# Altium PCB PCB1.PcbDoc (part 2 of 2)
Units mm, origin at the board's own origin, x right, y up, seen from the top; angles counter-clockwise.
Board outline 52.96 x 71.5 mm, 2 copper layers (Top Layer, Bottom Layer); 40 components, 74 nets, 275 pads, 212 vias.
Unrouted connection lines stored in the file: 1.
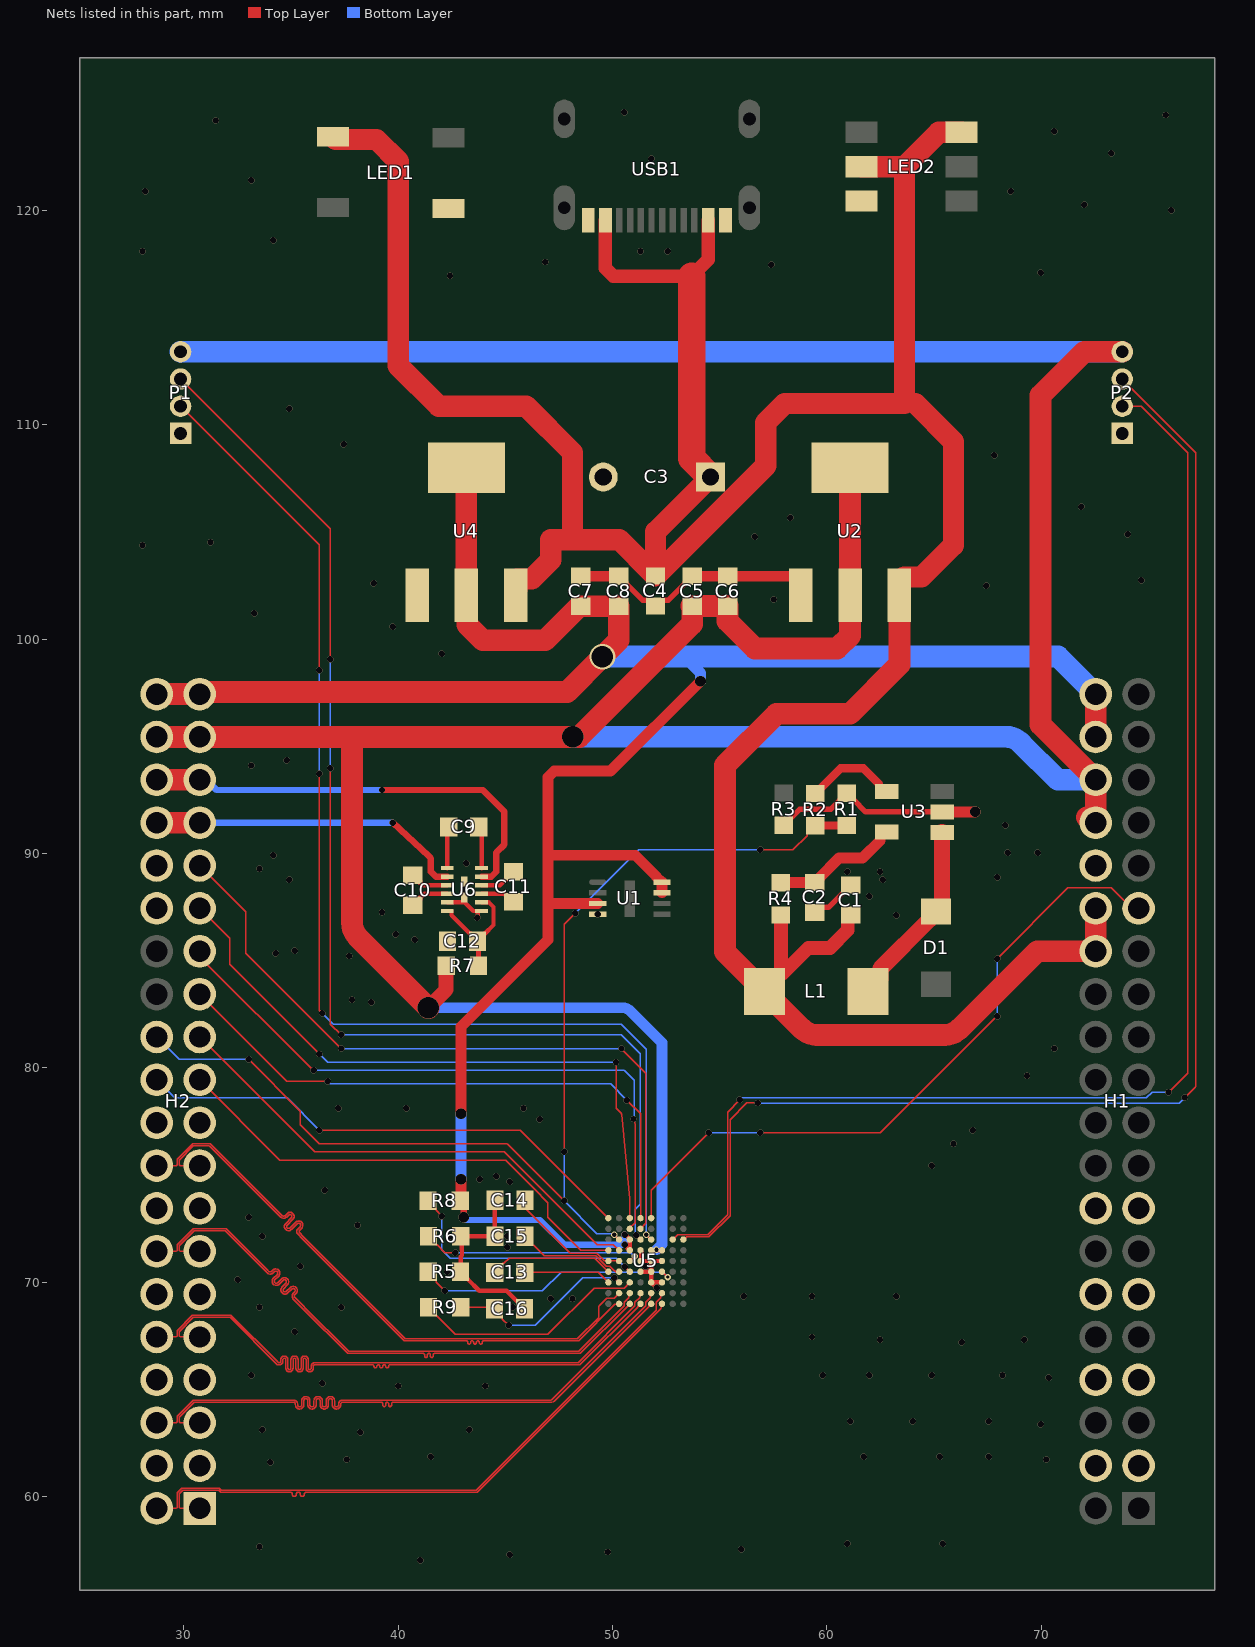
[diagram p2: the nets of this part, all layers, seen from the top]

## Via types
v1: diameter 0.3, hole 0.3, Top Layer to Bottom Layer, tented both sides, 199 vias
v2: diameter 0.5, hole 0.5, Top Layer to Bottom Layer, tented both sides, 5 vias
v3: diameter 0.3, hole 0.2, Top Layer to Bottom Layer, tented both sides, 3 vias
v4: diameter 1, hole 1, Top Layer to Bottom Layer, tented both sides, 2 vias
v5: diameter 0.3, hole 0.15, Top Layer to Bottom Layer, tented both sides, 2 vias
v6: diameter 1.2, hole 1, Top Layer to Bottom Layer, tented both sides, 1 vias

## Nets (pads, with @x,y where several pads share a name; then routed paths per layer and width w, separated by ;. In a path a pad name is that pad's centre, name@x,y a point inside that pad or via, vN(x,y) a via of type N, cw(c..) or ccw(c..) an arc to the next point about the centre after c; other vN are vias at no path point) (continued)
GND: C1.2 C2.2 C3.2 C4.2 C5.2 C6.2 C7.2 C8.2 C12.2 C14.2 C15.2 C16.2 H1.3 H1.4 H1.7 H1.8 H1.11 H1.12 H1.15 H1.16 H1.32 H2.3 H2.4 H2.7 H2.8 H2.11 H2.12 H2.15 H2.16 H2.19 H2.20 H2.30 H2.32 LED1.3 LED2.6 P1.1 P2.1 R1.1 R3.1 R5.2 R6.2 U1.4 U2.1 U3.2 U4.1 U5.D4 U5.E4 U5.E5 U5.E6 U5.F4 U5.F5 U5.G5 U5.G6 U6.5 U6.7 USB1.A1B12 USB1.B1A12 | length 39.5
  Top Layer w0.203: U6.5@42.291,87.719 43.02,87.719 U6.5@43.118,87.818 ; U6.5@43.076,87.75 43.508,87.319 U6.7@43.891,87.319 ; v1(43.688,86.995) 43.707,87.014 U6.7@43.707,87.317 ; C14.2@44.514,73.813 44.512,73.811 C15.2@44.512,72.136 R6.2@42.917,72.136 42.961,72.092 42.961,71.518 42.979,71.501 42.979,71.247 42.926,71.194 42.926,70.489 R5.2@42.909,70.472 42.909,70.443 43.21,70.141 43.239,70.141 43.785,69.596 45.06,69.596 45.549,69.107 45.599,69.107 45.898,68.809 C16.2@45.898,68.759 ; U5.F4@51.308,70.485 U5.F5@51.808,70.485 ; U5.D4@51.308,71.485 51.308,71.459 51.342,71.425 51.342,71.085 51.327,71.07 51.327,71.004 U5.E4@51.308,70.985 U5.E5@51.808,70.985 ; v1(51.562,70.739) 51.808,70.739 ; 51.804,70.231 51.808,70.235 ; v1@52.07,69.723 U5.G5@51.808,69.985 ; U5.G6@52.308,69.985 U5.G5@51.808,69.985 ; U5.E6@52.308,70.985 U5.E5@51.808,70.985 ; U5.G5@51.808,69.985 51.808,70.235 ; 51.808,70.235 U5.F5@51.808,70.485 ; U5.F5@51.808,70.485 51.808,70.739 ; 51.808,70.739 U5.E5@51.808,70.985
  Top Layer w0.254: C8.2@50.292,102.935 50.342,102.935 50.615,102.662 50.615,102.612 51.404,101.823 51.734,101.823 C4.2@52.006,101.55 52.279,101.823 52.609,101.823 53.398,102.612 53.398,102.662 53.671,102.935 C5.2@53.721,102.935 ; R3.1@57.989,91.316 58.018,91.316 58.294,91.592 58.294,91.621 58.743,92.069 60.192,92.069 60.631,92.509 60.631,92.538 60.908,92.814 R1.1@60.936,92.814 60.965,92.814 61.241,92.538 61.241,92.509 61.809,91.941 U3.2@65.379,91.941 ; C2.2@59.436,87.249 59.673,87.486 60.08,87.486 60.792,88.199 60.792,88.249 61.065,88.522 C1.2@61.115,88.522
  Top Layer w0.508: C7.2@48.514,102.935 C8.2@50.292,102.935 ; C5.2@53.721,102.935 C6.2@55.372,102.935 58.491,102.935 58.787,102.639 U2.1@58.787,102.059 ; U3.2@65.379,91.941 66.922,91.941 v2(66.929,91.948)
  other v1: 41.021,57.023 45.212,57.277 49.784,57.404 56.007,57.531 33.528,57.658 60.96,57.785 65.405,57.785 34.036,61.595 37.592,61.722 70.231,61.722 41.529,61.849 61.722,61.849 65.278,61.849 67.564,61.849 38.227,62.992 33.655,63.119 43.307,63.119 69.977,63.373 61.087,63.5 64.008,63.5 67.564,63.5 40.005,65.151 44.069,65.151 36.449,65.278 70.358,65.532 33.147,65.659 59.817,65.659 61.976,65.659 64.897,65.659 68.199,65.659 66.294,67.183 62.484,67.31 69.215,67.31 59.309,67.437 35.179,67.691 33.528,68.834 37.338,68.834 45.339,68.834 47.117,69.215 48.133,69.215 56.134,69.342 59.309,69.342 63.246,69.342 52.064,69.736 32.512,70.104 42.291,70.485 35.433,70.739 45.085,71.628 33.655,72.136 42.418,72.136 45.085,72.136 38.1,72.644 33.02,73.025 36.576,74.295 45.212,74.676 43.815,74.803 44.577,74.93 64.897,75.438 65.913,76.454 66.802,77.089 46.609,77.597 37.211,78.105 40.386,78.105 45.847,78.105 69.342,79.629 70.612,80.899 38.735,83.058 37.846,83.185 37.719,85.217 34.29,85.344 35.179,85.471 40.767,85.979 39.878,86.233 63.246,87.122 49.314,87.165 39.243,87.249 61.976,88.011 43.091,88.319 34.925,88.773 62.611,88.773 67.945,88.9 60.96,89.154 62.484,89.154 33.528,89.281 43.18,89.535 34.163,89.916 68.453,90.043 69.85,90.043 68.326,91.313 33.147,94.107 34.798,94.361 42.037,99.314 39.751,100.584 33.274,101.219 57.531,101.854 67.437,102.489 38.862,102.616 74.676,102.743 28.067,104.394 31.242,104.521 56.642,104.775 74.041,104.902 58.293,105.664 71.882,106.172 67.818,108.585 37.465,109.093 34.925,110.744 42.418,116.967 69.977,117.094 57.404,117.475 46.863,117.602 28.067,118.11 51.308,118.11 52.578,118.11 34.163,118.618 76.073,120.015 72.009,120.269 28.194,120.904 68.58,120.904 33.147,121.412 51.816,122.428 73.279,122.682 70.612,123.698 31.496,124.206 75.819,124.46 50.546,124.587
IOVCC: C7.1 C8.1 H1.38 H1.40 H2.39 H2.40 R8.2 U1.3 U1.7 U1.8 U4.2 U4.4 U5.C3 U5.D3 | length 116.4
  Top Layer w0.2: v1(50.563,71.738) 50.563,71.73 U5.D3@50.808,71.485 U5.C3@50.808,71.985 ; v1(50.581,72.212) cw(c50.494,72.032) 50.636,72.173 50.769,72.04 cw(c50.628,71.898) U5.C3@50.808,71.985
  Top Layer w0.3: R8.2@42.899,73.798 43.053,73.644 v2(43.053,73.025)
  Top Layer w0.5: R8.2@42.899,73.798 42.926,73.825 v2(42.926,74.803) ; v2(42.926,77.851) 42.926,81.915 46.99,85.979 46.99,87.63 ; U1.3@49.314,87.665 47.025,87.665 46.99,87.63 ; U1.7@52.314,88.165 U1.8@52.314,88.665 52.289,88.665 52.039,88.915 52.039,88.94 51.063,89.916 46.99,89.916 ; v2(54.102,98.044) 49.911,93.853 47.283,93.853 46.99,93.56 46.99,89.916 ; 46.99,87.63 46.99,89.916
  Top Layer w1.016: H2.40@28.734,97.438 H2.39@30.734,97.438 30.831,97.535 H2.39@31.19,97.535 ; H2.39@31.191,97.536 47.879,97.536 v6(49.53,99.187) 50.292,99.949 C8.1@50.292,101.535 C7.1@48.514,101.535 48.449,101.535 46.863,99.949 43.942,99.949 43.222,100.669 43.222,102.017 U4.2@43.18,102.059 U4.4@43.18,107.999 ; H1.38@72.549,95.438 H1.40@72.549,97.438
  Bottom Layer w0.3: v2(43.053,73.025) 43.18,72.898 46.609,72.898 47.769,71.738 v1(50.563,71.738) 50.563,72.112 cw(c50.863,72.112) v1(50.581,72.212)
  Bottom Layer w0.5: v2(42.926,74.803) v2(42.926,77.851) ; 53.34,99.187 54.102,98.425 v2(54.102,98.044)
  Bottom Layer w1.016: v6(49.53,99.187) 53.34,99.187 70.8,99.187 H1.40@72.549,97.438
NetC2_1: C2.1 R4.1 U3.5 | length 6.1
  Top Layer w0.508: R4.1@57.862,88.64 57.871,88.649 C2.1@59.436,88.649 59.486,88.649 59.632,88.795 59.632,88.845 60.57,89.783 61.672,89.783 62.495,90.607 62.495,90.897 62.591,90.993 U3.5@62.791,90.993
NetC9_1: C9.1 U6.12 | length 2
  Top Layer w0.203: C9.1@43.76,91.24 43.891,91.109 U6.12@43.891,89.319
NetC9_2: C9.2 U6.1 | length 1.9
  Top Layer w0.203: U6.1@42.291,89.319 42.291,91.171 C9.2@42.36,91.24
NetC10_1: C10.1 U6.3 | length 1.8
  Top Layer w0.203: C10.1@41.001,88.668 41.15,88.519 U6.3@42.291,88.519
  Top Layer w0.254: C10.1@40.678,88.988 40.728,88.988 41.001,88.715 C10.1@41.001,88.668
NetC10_2: C10.2 U6.4 | length 1.9
  Top Layer w0.203: C10.2@41.001,87.911 41.209,88.119 U6.4@42.291,88.119
  Top Layer w0.254: C10.2@40.678,87.588 40.728,87.588 41.001,87.861 C10.2@41.001,87.911
NetC11_1: C11.1 U6.9 | length 1.6
  Top Layer w0.203: U6.9@43.891,88.119 44.954,88.119 C11.1@45.327,87.746
  Top Layer w0.254: C11.1@45.327,87.746 C11.1@45.377,87.746
NetC11_2: C11.2 U6.10 | length 1.8
  Top Layer w0.203: U6.10@43.891,88.519 44.75,88.519 C11.2@45.054,88.823
  Top Layer w0.254: C11.2@45.054,88.823 45.054,88.873 45.327,89.146 C11.2@45.377,89.146
NetC12_1: C12.1 R7.1 U6.6 U6.8 | length 5.8
  Top Layer w0.203: U6.6@42.291,87.319 42.488,87.319 42.489,87.317 42.489,87.121 43.356,86.254 43.397,86.254 C12.1@43.695,85.956 ; C12.1@43.695,85.906 C12.1@43.695,85.956 ; U6.8@43.891,87.719 44.234,87.719 44.45,87.503 44.45,86.661 44.043,86.254 43.993,86.254 C12.1@43.695,85.956
  Top Layer w0.254: C12.1@43.695,85.906 43.748,85.853 R7.1@43.748,84.763
NetC13_1: C13.1 U5.G1 | length 4.1
  Top Layer w0.06: C13.1@45.906,70.449 49.344,70.449 U5.G1@49.808,69.985
NetC13_2: C13.2 U5.F1 | length 5.9
  Top Layer w0.06: C13.2@44.506,70.449 44.506,70.499 44.876,70.869 44.926,70.869 45.177,71.12 49.173,71.12 U5.F1@49.808,70.485
NetC14_1: C14.1 U5.E1 U5.E2 | length 5.8
  Top Layer w0.06: C14.1@45.914,73.813 45.914,73.491 ccw(c45.974,73.491) 45.931,73.449 48.013,71.367 ccw(c48.055,71.41) 48.054,71.35 49.268,71.35 49.611,71.007 49.786,71.007 U5.E1@49.808,70.985 U5.E2@50.308,70.985
NetC15_1: C15.1 U5.F2 | length 5.1
  Top Layer w0.06: C15.1@45.912,72.136 45.912,72.086 46.282,71.716 46.332,71.716 46.813,71.235 49.221,71.235 49.706,70.75 49.875,70.75 50.043,70.583 50.123,70.502 ccw(c50.165,70.545) 50.165,70.485 U5.F2@50.308,70.485
NetD1_1: D1.1 L1.2 U3.1 | length 9
  Top Layer w0.762: L1.2@61.926,83.56 62.507,84.141 62.507,84.637 64.782,86.913 64.782,87.073 65.219,87.51 65.379,87.51 U3.1@65.379,90.991
NetR2_1: R2.1 U3.4 | length 4.4
  Top Layer w0.381: R2.1@59.463,92.797 59.492,92.797 59.704,93.01 59.704,93.038 60.64,93.974 61.71,93.974 62.432,93.253 62.432,93.053 62.591,92.893 U3.4@62.791,92.893
NetR5_1: R5.1 U5.F6 | length 12.4
  Top Layer w0.06: R5.1@41.402,70.472 41.766,70.108 41.766,69.994 v1(42.164,69.596) ; U5.F6@52.308,70.485 52.324,70.485 v5(52.576,70.233)
  Bottom Layer w0.06: v1(42.164,69.596) 46.711,69.596 ccw(c46.711,69.656) 46.753,69.613 47.582,70.442 cw(c47.624,70.399) 47.624,70.459 52.325,70.459 cw(c52.325,70.399) 52.367,70.442 v5(52.576,70.233)
NetR6_1: R6.1 U5.E3 | length 10.3
  Top Layer w0.06: R6.1@41.411,72.136 41.411,72.107 41.784,71.734 41.813,71.734 42.173,71.374 v1(42.672,71.374) ; U5.E3@50.808,70.985 v5(51.035,71.212)
  Bottom Layer w0.06: v1(42.672,71.374) 50.858,71.374 51.019,71.212 v5(51.035,71.212)
NetR8_1: R8.1 U5.F3 | length 11.8
  Top Layer w0.06: R8.1@41.392,73.798 41.766,73.424 41.766,73.357 v1(42.043,73.08) ; v1(50.581,70.712) U5.F3@50.808,70.485
  Bottom Layer w0.06: v1(42.043,73.08) 42.035,73.072 42.035,71.528 ccw(c42.095,71.528) 42.052,71.486 42.401,71.137 ccw(c42.443,71.18) 42.442,71.12 50.173,71.12 v1(50.581,70.712)
NetR9_1: R9.1 U5.G3 | length 10.9
  Top Layer w0.06: R9.1@41.411,68.834 41.411,68.805 41.784,68.432 41.804,68.432 42.672,67.564 46.99,67.564 49.146,69.72 50.543,69.72 U5.G3@50.808,69.985
PWM_EN: H1.29 U5.A5 | length 31.9
  Top Layer w0.06: U5.A5@51.808,72.985 51.808,74.287 v1(54.483,76.962) ; v1(56.896,76.962) 62.484,76.962 67.931,82.409 v1(67.959,82.409) ; v1(67.945,85.09) 71.255,88.4 73.271,88.4 74.233,87.438 H1.29@74.549,87.438
  Bottom Layer w0.06: v1(54.483,76.962) v1(56.896,76.962) ; v1(67.945,85.09) 67.945,82.423 v1(67.959,82.409)
SWCLK: P2.2 U5.C7 | length 62.9
  Top Layer w0.06: U5.C7@52.808,71.985 53.044,72.221 54.441,72.221 55.372,73.152 55.372,77.934 v1(55.941,78.503) ; P2.2@73.787,110.871 74.676,110.871 76.835,108.712 76.835,79.756 v1(75.946,78.867)
  Bottom Layer w0.06: v1(55.941,78.503) 56.011,78.573 cw(c56.054,78.531) 56.054,78.591 72.198,78.591 74.9,78.591 75.176,78.867 v1(75.946,78.867)
SWDIO: P2.3 U5.C8 | length 63.9
  Top Layer w0.06: U5.C8@53.308,71.985 53.342,71.985 53.463,72.106 54.489,72.106 55.487,73.104 55.487,77.585 56.261,78.359 56.766,78.359 v1(56.769,78.356) ; P2.3@73.787,112.141 77.216,108.712 77.216,79.146 cw(c77.156,79.146) 77.199,79.104 v1(76.708,78.613)
  Bottom Layer w0.06: v1(56.769,78.356) 76.451,78.356 v1(76.708,78.613)
TD_CLKN: H2.10 U5.H4 | length 28.7
  Top Layer w0.06: H2.10@28.734,67.438 29.649,67.438 29.684,67.473 29.684,67.734 30.401,68.451 32.198,68.451 34.372,66.277 34.408,66.242 34.452,66.242 ccw(c34.452,66.31) 34.52,66.31 34.52,66.379 cw(c34.688,66.379) 34.688,66.547 cw(c34.688,66.379) 34.857,66.379 34.857,65.986 ccw(c34.925,65.986) 34.925,65.918 ccw(c34.925,65.986) 34.993,65.986 34.993,66.379 cw(c35.161,66.379) 35.161,66.547 cw(c35.161,66.379) 35.329,66.379 35.329,65.986 ccw(c35.397,65.986) 35.397,65.918 ccw(c35.397,65.986) 35.465,65.986 35.465,66.379 cw(c35.633,66.379) 35.633,66.547 cw(c35.633,66.379) 35.801,66.379 35.801,65.986 ccw(c35.869,65.986) 35.869,65.918 ccw(c35.869,65.986) 35.938,65.986 35.938,66.074 cw(c36.106,66.074) 36.106,66.242 36.489,66.242 48.397,66.242 51.043,68.888 51.043,69.052 51.262,69.271 51.262,69.439 U5.H4@51.308,69.485
TD_CLKP: H2.9 U5.J4 | length 28.7
  Top Layer w0.06: H2.9@30.734,67.438 29.819,67.438 29.784,67.473 29.784,67.693 30.442,68.351 32.156,68.351 34.366,66.142 34.372,66.142 34.452,66.142 ccw(c34.452,66.31) 34.62,66.31 34.62,66.379 cw(c34.688,66.379) 34.688,66.447 cw(c34.688,66.379) 34.757,66.379 34.757,65.986 ccw(c34.925,65.986) 34.925,65.818 ccw(c34.925,65.986) 35.093,65.986 35.093,66.379 cw(c35.161,66.379) 35.161,66.447 cw(c35.161,66.379) 35.229,66.379 35.229,65.986 ccw(c35.397,65.986) 35.397,65.818 ccw(c35.397,65.986) 35.565,65.986 35.565,66.379 cw(c35.633,66.379) 35.633,66.447 cw(c35.633,66.379) 35.701,66.379 35.701,65.986 ccw(c35.869,65.986) 35.869,65.818 ccw(c35.869,65.986) 36.038,65.986 36.038,66.074 cw(c36.106,66.074) 36.106,66.142 36.489,66.142 38.636,66.142 38.802,66.142 cw(c38.802,66.074) 38.871,66.074 38.871,66.066 ccw(c38.939,66.066) 39.007,66.066 39.007,66.074 cw(c39.075,66.074) 39.143,66.074 39.143,66.066 ccw(c39.211,66.066) 39.279,66.066 39.279,66.074 cw(c39.347,66.074) 39.415,66.074 39.415,66.066 ccw(c39.483,66.066) 39.552,66.066 39.552,66.074 cw(c39.62,66.074) 39.62,66.142 39.88,66.142 48.454,66.142 ccw(c48.454,66.202) 48.496,66.159 51.167,68.83 ccw(c51.125,68.872) 51.176,68.841 51.191,68.866 cw(c51.242,68.834) 51.199,68.876 U5.J4@51.308,68.985
TD_CS: H2.31 U5.B4 | length 33.3
  Top Layer w0.06: H2.31@30.734,89.438 32.893,87.279 32.893,85.344 v1(37.338,80.899) ; v1(50.419,80.899) 51.562,79.756 51.562,72.739 U5.B4@51.308,72.485
  Bottom Layer w0.06: v1(37.338,80.899) v1(50.419,80.899)
TD_D0N: H2.2 U5.H6 | length 28.5
  Top Layer w0.06: H2.2@28.734,59.438 29.649,59.438 29.684,59.473 29.684,60.174 29.9,60.39 31.66,60.39 31.752,60.298 43.649,60.298 52.043,68.692 52.043,69.052 52.262,69.271 52.262,69.439 U5.H6@52.308,69.485
TD_D0P: H2.1 U5.J6 | length 28.5
  Top Layer w0.06: H2.1@30.734,59.438 29.819,59.438 29.784,59.473 29.784,60.132 29.942,60.29 31.618,60.29 31.71,60.198 34.747,60.198 34.964,60.198 cw(c34.964,60.105) 35.058,60.105 35.058,60.089 ccw(c35.151,60.089) 35.245,60.089 35.245,60.105 cw(c35.338,60.105) 35.432,60.105 35.432,60.089 ccw(c35.525,60.089) 35.619,60.089 35.619,60.105 cw(c35.712,60.105) 35.712,60.198 35.899,60.198 43.69,60.198 52.25,68.758 ccw(c52.208,68.8) 52.268,68.8 52.268,68.928 cw(c52.328,68.928) U5.J6@52.308,68.985
TD_D1N: H2.6 U5.H5 | length 28.5
  Top Layer w0.06: H2.6@28.734,63.438 29.649,63.438 29.684,63.473 29.684,63.734 30.439,64.489 32.622,64.489 ccw(c32.622,64.549) 32.626,64.489 32.692,64.492 cw(c32.7,64.332) 32.699,64.492 34.823,64.492 35.114,64.492 cw(c35.114,64.299) 35.308,64.299 35.308,64.27 ccw(c35.401,64.27) 35.495,64.27 35.495,64.467 cw(c35.688,64.467) 35.882,64.467 35.882,64.27 ccw(c35.975,64.27) 36.069,64.27 36.069,64.467 cw(c36.262,64.467) 36.456,64.467 36.456,64.27 ccw(c36.549,64.27) 36.643,64.27 36.643,64.467 cw(c36.836,64.467) 37.03,64.467 37.03,64.27 ccw(c37.123,64.27) 37.217,64.27 37.217,64.299 cw(c37.41,64.299) 37.41,64.492 37.49,64.492 47.123,64.492 ccw(c47.123,64.552) 47.165,64.51 51.543,68.888 51.543,69.052 51.762,69.271 51.762,69.439 U5.H5@51.808,69.485
TD_D1P: H2.5 U5.J5 | length 28.5
  Top Layer w0.06: H2.5@30.734,63.438 29.819,63.438 29.784,63.473 29.784,63.693 30.48,64.389 32.65,64.389 ccw(c32.65,64.449) 32.655,64.389 32.695,64.392 cw(c32.7,64.332) 32.699,64.392 34.823,64.392 35.114,64.392 cw(c35.114,64.299) 35.208,64.299 35.208,64.27 ccw(c35.401,64.27) 35.595,64.27 35.595,64.467 cw(c35.688,64.467) 35.782,64.467 35.782,64.27 ccw(c35.975,64.27) 36.169,64.27 36.169,64.467 cw(c36.262,64.467) 36.356,64.467 36.356,64.27 ccw(c36.549,64.27) 36.743,64.27 36.743,64.467 cw(c36.836,64.467) 36.93,64.467 36.93,64.27 ccw(c37.123,64.27) 37.317,64.27 37.317,64.299 cw(c37.41,64.299) 37.41,64.392 37.49,64.392 39.047,64.392 39.213,64.392 cw(c39.213,64.324) 39.281,64.324 39.281,64.261 ccw(c39.349,64.261) 39.417,64.261 39.417,64.324 cw(c39.485,64.324) 39.554,64.324 39.554,64.261 ccw(c39.622,64.261) 39.69,64.261 39.69,64.324 cw(c39.758,64.324) 39.758,64.392 40.087,64.392 47.123,64.392 ccw(c47.123,64.552) 47.169,64.399 47.251,64.424 ccw(c47.234,64.481) 47.276,64.439 51.695,68.857 ccw(c51.652,68.9) 51.703,68.868 51.718,68.893 cw(c51.769,68.862) 51.727,68.904 U5.J5@51.808,68.985
TD_D2N: H2.14 U5.H3 | length 28.5
  Top Layer w0.06: H2.14@28.734,71.438 29.649,71.438 29.684,71.473 29.684,71.734 30.44,72.49 31.969,72.49 33.904,70.556 33.945,70.514 33.96,70.499 ccw(c34.026,70.565) 34.092,70.499 34.149,70.556 ; 34.15,70.557 cw(c34.287,70.42) 34.407,70.571 34.409,70.571 34.423,70.557 ; 34.424,70.556 34.438,70.542 34.438,70.54 cw(c34.287,70.42) 34.424,70.283 34.246,70.106 ccw(c34.313,70.04) 34.247,69.974 ccw(c34.313,70.04) 34.379,69.974 34.555,70.15 ; 34.556,70.151 cw(c34.693,70.014) 34.813,70.166 34.815,70.166 34.829,70.151 ; 34.83,70.15 34.844,70.136 34.844,70.134 cw(c34.693,70.014) 34.829,69.877 34.652,69.7 ccw(c34.719,69.634) 34.653,69.568 ccw(c34.719,69.634) 34.785,69.568 34.961,69.744 ; 34.961,69.745 cw(c35.099,69.608) 35.219,69.76 35.221,69.76 35.235,69.746 ; 35.236,69.744 35.25,69.73 35.25,69.729 cw(c35.099,69.608) 35.235,69.471 35.178,69.414 ccw(c35.244,69.348) 35.178,69.282 35.605,68.854 35.647,68.812 37.684,66.775 48.43,66.775 50.543,68.888 50.543,69.052 50.762,69.271 50.762,69.439 U5.H3@50.808,69.485
TD_D2P: H2.13 U5.J3 | length 28.5
  Top Layer w0.06: H2.13@30.734,71.438 29.819,71.438 29.784,71.473 29.784,71.693 30.481,72.39 31.928,72.39 33.833,70.485 33.875,70.443 33.889,70.428 ccw(c34.026,70.565) 34.163,70.428 34.221,70.487 cw(c34.287,70.42) 34.353,70.486 ; 34.353,70.486 cw(c34.287,70.42) 34.353,70.354 34.177,70.178 ccw(c34.313,70.04) 34.176,69.904 ccw(c34.313,70.04) 34.45,69.904 34.627,70.081 cw(c34.693,70.014) 34.758,70.081 ; 34.759,70.08 cw(c34.693,70.014) 34.759,69.948 34.583,69.772 ccw(c34.719,69.634) 34.582,69.498 ccw(c34.719,69.634) 34.856,69.498 35.033,69.675 cw(c35.099,69.608) 35.164,69.675 ; 35.165,69.674 cw(c35.099,69.608) 35.165,69.542 35.107,69.484 ccw(c35.244,69.348) 35.107,69.211 35.535,68.783 35.576,68.741 37.643,66.675 40.996,66.675 41.162,66.675 cw(c41.162,66.607) 41.23,66.607 41.23,66.548 ccw(c41.298,66.548) 41.366,66.548 41.366,66.607 cw(c41.434,66.607) 41.502,66.607 41.502,66.548 ccw(c41.57,66.548) 41.639,66.548 41.639,66.607 cw(c41.707,66.607) 41.707,66.675 42.002,66.675 48.487,66.675 ccw(c48.487,66.735) 48.529,66.692 50.695,68.857 ccw(c50.652,68.9) 50.703,68.868 50.718,68.893 cw(c50.769,68.862) 50.727,68.904 U5.J3@50.808,68.985
TD_D3N: H2.18 U5.H2 | length 28.8
  Top Layer w0.06: H2.18@28.734,75.438 29.649,75.438 29.684,75.473 29.684,75.734 30.402,76.452 31.176,76.452 cw(c31.176,76.292) 31.288,76.406 34.53,73.164 34.587,73.107 ccw(c34.653,73.173) 34.719,73.107 34.812,73.2 cw(c34.949,73.064) 35.086,73.201 cw(c34.949,73.064) 35.086,72.927 34.819,72.66 ccw(c34.886,72.594) 34.82,72.528 ccw(c34.886,72.594) 34.952,72.528 35.218,72.794 ; 35.218,72.795 cw(c35.355,72.658) 35.492,72.795 cw(c35.355,72.658) 35.492,72.521 35.399,72.428 ccw(c35.465,72.362) 35.399,72.296 35.575,72.119 38.276,69.418 40.334,67.361 48.363,67.361 49.35,68.348 ccw(c49.307,68.39) 49.367,68.39 49.367,68.852 cw(c49.427,68.852) 49.385,68.894 49.741,69.25 50.073,69.25 U5.H2@50.308,69.485
TD_D3P: H2.17 U5.J2 | length 28.7
  Top Layer w0.06: H2.17@30.734,75.438 29.819,75.438 29.784,75.473 29.784,75.693 30.443,76.352 31.176,76.352 cw(c31.176,76.292) 31.218,76.335 34.46,73.093 34.516,73.037 ccw(c34.653,73.173) 34.79,73.037 34.884,73.13 cw(c34.949,73.064) 35.016,73.13 cw(c34.949,73.064) 35.016,72.998 34.75,72.732 ccw(c34.886,72.594) 34.749,72.458 ccw(c34.886,72.594) 35.023,72.458 35.29,72.725 cw(c35.355,72.658) 35.421,72.724 cw(c35.355,72.658) 35.421,72.592 35.328,72.499 ccw(c35.465,72.362) 35.328,72.225 35.504,72.049 40.292,67.261 42.977,67.261 43.175,67.261 cw(c43.175,67.193) 43.243,67.193 43.243,67.176 ccw(c43.311,67.176) 43.379,67.176 43.379,67.193 cw(c43.447,67.193) 43.516,67.193 43.516,67.176 ccw(c43.584,67.176) 43.652,67.176 43.652,67.193 cw(c43.72,67.193) 43.788,67.193 43.788,67.176 ccw(c43.856,67.176) 43.924,67.176 43.924,67.193 cw(c43.992,67.193) 43.992,67.261 44.022,67.261 48.416,67.261 50.114,68.959 50.282,68.959 U5.J2@50.308,68.985
TD_INT: H2.23 U5.D2 | length 23.7
  Top Layer w0.06: H2.23@30.734,81.438 36.099,76.073 44.958,76.073 49.281,71.75 50.043,71.75 U5.D2@50.308,71.485
TD_LEDPWM: H2.24 R1.2 R2.2 U5.C2 | length 53.9
  Top Layer w0.06: v1(33.02,80.391) 35.433,77.978 35.433,77.343 36.322,76.454 45.06,76.454 cw(c45.06,76.394) 45.102,76.437 v1(47.752,73.787) ; v1(47.752,76.073) 47.752,86.678 cw(c47.812,86.677) 47.769,86.719 v1(48.26,87.21) ; v3(50.081,72.212) U5.C2@50.308,71.985 ; v1(56.896,90.17) 58.42,90.17 59.082,90.832 59.082,90.917 59.455,91.29 R2.2@59.463,91.29
  Top Layer w0.381: R2.2@59.463,91.29 59.48,91.307 R1.2@60.936,91.307
  Bottom Layer w0.06: H2.24@28.734,81.438 29.781,80.391 v1(33.02,80.391) ; v1(47.752,76.073) v1(47.752,73.787) 49.276,72.263 49.925,72.263 49.93,72.258 50.035,72.258 v3(50.081,72.212) ; v1(48.26,87.21) 51.203,90.153 cw(c51.245,90.11) 51.244,90.17 v1(56.896,90.17)
TD_MISO: H2.29 U5.A3 | length 30.5
  Top Layer w0.06: H2.29@30.734,87.438 32.131,86.041 32.131,84.836 v1(36.322,80.645) ; v1(50.165,80.264) 50.165,78.158 ccw(c50.225,78.158) 50.183,78.115 50.39,77.909 cw(c50.308,77.828) 50.422,77.839 50.808,73.889 cw(c50.748,73.884) 50.808,73.885 ; U5.A3@50.808,72.985 50.808,73.884
  Bottom Layer w0.06: v1(36.322,80.645) 36.703,80.264 v1(50.165,80.264)
TD_MOSI: H2.27 U5.B3 | length 30
  Top Layer w0.06: H2.27@30.734,85.438 30.734,85.202 ccw(c30.794,85.202) 30.751,85.16 v1@36.048,79.863 ; U5.B3@50.808,72.485 50.808,72.525 51.054,72.771 51.054,77.341 ccw(c50.994,77.341) 51.052,77.357 v1(50.981,77.611)
  Bottom Layer w0.06: v1(36.068,79.883) 37.357,79.883 ; 37.363,79.883 50.521,79.883 cw(c50.521,79.823) 50.564,79.865 51.008,79.421 cw(c50.965,79.379) 51.02,79.404 cw(c50.966,79.378) 51.026,79.378 51.026,77.881 cw(c50.966,77.881) 51.025,77.871 v1(50.981,77.611)
TD_RST: H2.21 U5.D1 | length 22.8
  Top Layer w0.06: H2.21@30.734,79.438 34.48,75.692 44.98,75.692 cw(c44.98,75.632) 45.022,75.675 46.349,74.348 46.99,73.707 46.99,73.025 48.53,71.485 U5.D1@49.808,71.485
TD_SCK: H2.25 U5.A4 | length 27.8
  Top Layer w0.06: H2.25@30.734,83.438 34.797,79.375 v1(36.703,79.375) ; v1(50.673,78.486) 51.308,77.851 U5.A4@51.308,72.985
  Bottom Layer w0.06: v1(36.703,79.375) 36.83,79.248 49.911,79.248 v1(50.673,78.486)
TD_TP_RST: H2.22 U5.A1 | length 23.8
  Top Layer w0.06: v1(36.326,77.081) 36.335,77.089 45.704,77.089 U5.A1@49.808,72.985
  Bottom Layer w0.06: H2.22@28.734,79.438 29.581,78.591 34.816,78.591 v1(36.326,77.081)
UART_RX: P1.2 U5.C5 | length 55.9
  Top Layer w0.06: P1.2@29.845,110.871 36.32,104.396 v1(36.32,98.55) ; v1(36.322,93.726) 36.322,82.677 v1(36.449,82.55) ; v3(51.581,72.212) U5.C5@51.808,71.985
  Bottom Layer w0.06: v1(36.32,98.55) 36.322,98.548 v1(36.322,93.726) ; v1(36.449,82.55) 36.939,82.06 ccw(c36.982,82.102) 36.982,82.042 50.419,82.042 51.562,80.899 51.581,80.88 v3(51.581,72.212)
UART_TX: P1.3 U5.C4 | length 56.9
  Top Layer w0.06: P1.3@29.845,112.141 36.83,105.156 v1(36.83,99.06) ; v1(36.83,93.98) 36.83,82.042 v1(37.338,81.534) ; v1(51.1,72.178) ccw(c51.159,72.168) 51.126,72.118 51.287,72.009 cw(c51.254,71.959) U5.C4@51.308,71.985
  Bottom Layer w0.06: v1(36.83,93.98) v1(36.83,99.06) ; v1(37.338,81.534) 50.419,81.534 51.29,80.663 51.29,73.642 51.054,73.406 51.054,72.275 ccw(c51.114,72.275) 51.062,72.246 v1(51.1,72.178)
VCC: C5.1 C6.1 H1.34 H1.36 H2.37 H2.38 P1.4 P2.4 R7.2 U2.2 U2.4 U5.D5 U5.D6 | length 178.2
  Top Layer w0.2: U5.D5@51.808,71.509 U5.D5@51.808,71.485 U5.D6@52.308,71.485 52.308,71.512 U5.D6@52.294,71.527
  Top Layer w0.7: v4(41.402,82.804) 42.242,83.644 R7.2@42.242,84.763 42.251,84.681 ccw(c42.949,84.739) R7.2@42.253,84.663
  Top Layer w1.016: H2.38@28.734,95.438 H2.37@30.734,95.438 37.846,95.438 ; v4@41.41,82.796 v4(41.402,82.804) 38.141,86.065 cw(c38.862,86.781) 37.846,86.778 37.846,95.438 ; v4@48.145,95.438 37.846,95.438 ; v4@48.448,95.438 53.721,100.711 C5.1@53.721,101.535 ; C5.1@53.689,101.55 55.372,101.55 C6.1@55.372,101.535 55.372,100.838 56.642,99.568 60.492,99.568 61.087,100.163 U2.2@61.087,102.059 U2.4@61.087,107.999 ; H1.34@72.138,91.692 72.158,91.692 72.412,91.438 H1.34@72.549,91.438 H1.36@72.549,93.438 69.977,96.01 69.977,111.379 72.009,113.411 P2.4@73.787,113.411
  Bottom Layer w0.5: v4@41.337,82.804 50.466,82.804 cw(c50.466,82.304) 50.82,82.657 52.308,81.169 52.308,71.77 v3(52.05,71.512)
  Bottom Layer w1.016: P1.4@29.845,113.411 P2.4@73.787,113.411 ; v4(48.145,95.452) 68.338,95.452 cw(c68.338,94.436) 69.057,95.154 70.773,93.438 H1.36@72.549,93.438
VCC5V: C1.1 C3.1 C4.1 H1.28 H1.30 L1.1 LED1.1 LED2.3 LED2.5 R4.2 U2.3 U4.3 USB1.A4B9 USB1.B4A9 | length 158.3
  Top Layer w0.635: LED1.1@36.957,123.442 LED1.1@37.082,123.317 ; U4.3@45.48,102.059 U4.3@45.712,102.292 ; USB1.B4A9@49.67,119.558 49.67,117.313 50.042,116.941 53.695,116.941 54.47,117.716 USB1.A4B9@54.47,119.558 ; C4.1@51.874,103.083 51.874,103.033 51.957,102.951 C4.1@52.006,102.951 52.056,102.951 52.139,103.033 C4.1@52.139,103.083 ; L1.1@57.1,83.699 57.744,84.343 57.882,84.343 59.132,85.592 60.148,85.592 60.983,86.427 60.983,87.04 61.065,87.122 C1.1@61.115,87.122 ; 57.862,84.715 R4.2@57.862,87.134 ; U2.3@63.387,102.059 63.387,102.67 U2.3@63.619,102.902 ; 63.627,110.998 64.135,110.998
  Top Layer w1: LED1.1@37.082,123.317 38.989,123.317 40.005,122.301 40.005,112.767 41.901,110.871 45.974,110.871 48.133,108.712 48.133,104.648 ; U4.3@45.48,102.059 45.48,102.759 45.53,102.809 46.23,102.809 47.117,103.696 47.117,104.648 48.133,104.648 ; C4.1@51.874,103.083 50.309,104.648 48.133,104.648 ; C4.1@52.006,102.951 52.006,105.005 C3.1@54.57,107.569 ; C4.1@52.139,103.083 57.15,108.094 57.15,110.109 58.039,110.998 63.627,110.998 63.627,122.047 ; LED2.5@61.626,122.047 63.627,122.047 ; U2.3@63.619,102.902 64.421,102.902 65.913,104.394 65.913,109.22 64.135,110.998 ; LED2.3@66.294,123.647 65.227,123.647 63.627,122.047
  Top Layer w1.016: L1.1@57.1,83.56 57.1,83.422 57.554,82.969 57.692,82.969 58.829,81.832 ccw(c59.547,82.55) 59.547,81.534 65.492,81.534 ccw(c65.492,82.55) 66.211,81.832 69.817,85.438 H1.28@72.549,85.438 H1.30@72.549,87.438 ; L1.1@57.1,83.699 56.647,84.152 56.508,84.152 55.245,85.416 55.245,94.107 57.658,96.52 61.087,96.52 63.387,98.82 U2.3@63.387,102.059
  Top Layer w1.27: 53.695,116.941 53.695,108.444 C3.1@54.57,107.569
VDD13CP: C16.1 R9.2 U5.G2 | length 8.9
  Top Layer w0.06: R9.2@42.917,68.834 44.422,68.834 C16.1@44.498,68.759 44.865,68.392 44.865,68.268 v1(45.154,67.979) ; v1(50.081,70.212) U5.G2@50.308,69.985 U5.G2@50.272,69.985
  Bottom Layer w0.06: v1(45.154,67.979) 46.389,67.979 48.622,70.212 v1(50.081,70.212)
VSN: H2.35 H2.36 U6.11 | length 20.6
  Top Layer w0.3: v1(39.243,92.964) 43.942,92.964 44.958,91.948 44.958,90.424 44.577,90.043 44.577,89.154 44.342,88.919 U6.11@43.891,88.919
  Top Layer w1.016: H2.36@28.734,93.438 H2.35@30.734,93.438
  Bottom Layer w0.3: H2.35@30.734,93.438 31.048,93.438 31.522,92.964 v1(39.243,92.964)
VSP: H2.33 H2.34 U6.2 | length 14.9
  Top Layer w0.3: v1(39.751,91.44) 41.433,89.878 cw(c41.229,89.658) 41.529,89.659 ; 41.529,89.658 41.529,89.154 41.764,88.919 U6.2@42.291,88.919
  Top Layer w1.016: H2.34@28.734,91.438 H2.33@30.734,91.438
  Bottom Layer w0.3: H2.33@30.734,91.438 39.619,91.438 ccw(c39.619,91.738) 39.625,91.438 v1(39.751,91.44)
pads on no net: H1.33 H1.35 H1.37 H1.39 LED1.2 LED2.1 LED2.4 U1.0 U5.G4 U5.H1 U5.J1 USB1.1 USB1.2 USB1.3 USB1.4 USB1.A5 USB1.A6 USB1.A7 USB1.A8 USB1.B5 USB1.B6 USB1.B7 USB1.B8
copper on no net: | length 4
  Top Layer w1.016: 74.549,91.438 74.549,93.438 ; 74.549,95.438 74.549,97.438

## Polygon pours and split planes (outlines as drawn)
GND on Bottom Layer "GND_L02_P001" (hatched Horizontal grid 0.2 track 0.2, remove dead copper, pour order 1): 15.748,136.017 129.032,136.017 135.763,129.286 111.633,105.156 111.633,37.465 0.127,37.465 0,37.592
GND on Top Layer "GND_L01_P000" (hatched Horizontal grid 0.2 track 0.2, remove dead copper, pour order 0): 16.764,137.795 18.796,135.763 97.79,135.763 97.79,31.623 96.52,30.353 94.742,32.131 0,32.131

## Keep-outs
Keep-Out Layer:
  the board outline again, w0.254